# EAGLE board 11-16-21_LEDSubMatrixHighDensity_template (EAGLE 9.6.2)
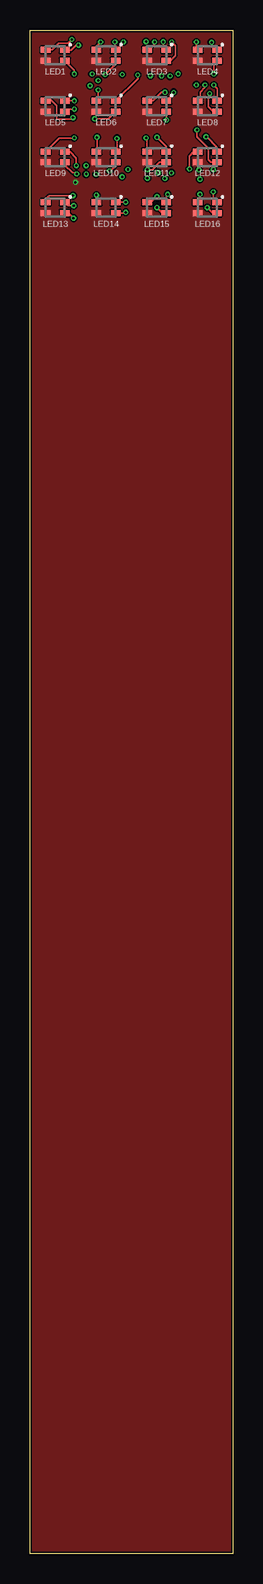
[diagram p0: board, top side]
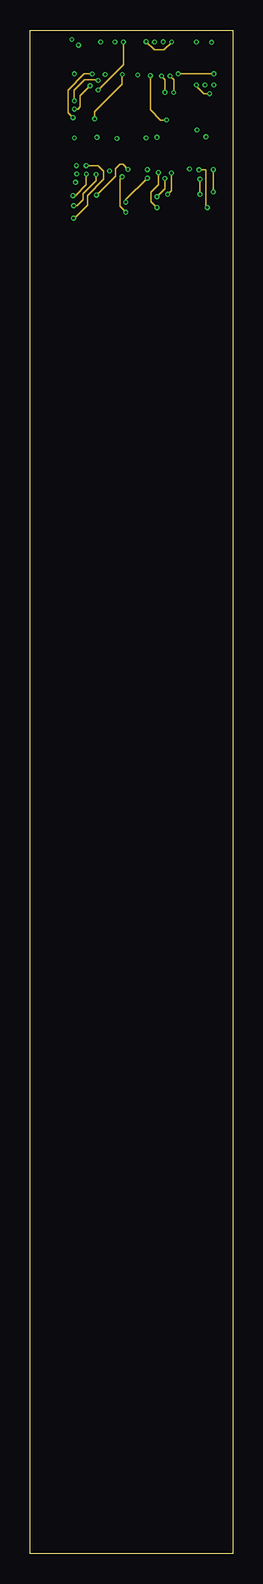
[diagram p1: board, inner layer InnerBottom]
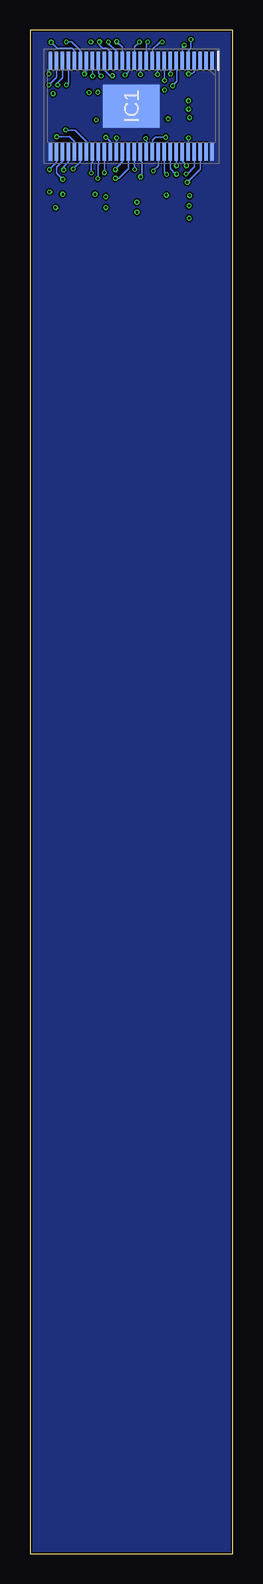
[diagram p2: board, bottom side, seen from below]

Size 16.93 x 127 mm. Coordinates in mm from the lower left corner, seen from the top.
Outline: 0,127 16.93,127 16.93,0 0,0 0,127
Copper layers (1+2*15+16): Top 0.035mm / dielectric 0.2mm / InnerTop 0.0175mm / dielectric 1.065mm / InnerBottom 0.0175mm / dielectric 0.2mm / Bottom 0.035mm
Design rules "jlcpcb_4layer_1oz *": minimum track width 5mil, minimum drill 0.2mm, track to track 5mil, track to pad 0.2mm, pad to pad 5mil, via to via 6mil, smd to smd 5mil, copper to edge 5mil, drill to drill 0.5mm, minimum pad ring 10mil, minimum via ring 0.1mm, stop-mask expansion 4mil, vias tented up to drill 0mil, thermal gap 10mil

## Footprints (pad centres in the part's own frame; a part is rotated, then mirrored left to right if it is on the bottom)
SOP50P810X120-57N = smd 1.475 x 0.3: 1 -3.788,6.75; 2 -3.788,6.25; 3 -3.788,5.75; 4 -3.788,5.25; 5 -3.788,4.75; 6 -3.788,4.25; 7 -3.788,3.75; 8 -3.788,3.25; 9 -3.788,2.75; 10 -3.788,2.25; 11 -3.788,1.75; 12 -3.788,1.25; 13 -3.788,0.75; 14 -3.788,0.25; 15 -3.788,-0.25; 16 -3.788,-0.75; 17 -3.788,-1.25; 18 -3.788,-1.75; 19 -3.788,-2.25; 20 -3.788,-2.75; 21 -3.788,-3.25; 22 -3.788,-3.75; 23 -3.788,-4.25; 24 -3.788,-4.75; 25 -3.788,-5.25; 26 -3.788,-5.75; 27 -3.788,-6.25; 28 -3.788,-6.75; 29 3.788,-6.75; 30 3.788,-6.25; 31 3.788,-5.75; 32 3.788,-5.25; 33 3.788,-4.75; 34 3.788,-4.25; 35 3.788,-3.75; 36 3.788,-3.25; 37 3.788,-2.75; 38 3.788,-2.25; 39 3.788,-1.75; 40 3.788,-1.25; 41 3.788,-0.75; 42 3.788,-0.25; 43 3.788,0.25; 44 3.788,0.75; 45 3.788,1.25; 46 3.788,1.75; 47 3.788,2.25; 48 3.788,2.75; 49 3.788,3.25; 50 3.788,3.75; 51 3.788,4.25; 52 3.788,4.75; 53 3.788,5.25; 54 3.788,5.75; 55 3.788,6.25; 56 3.788,6.75 | smd 3.61 x 4.7: 57 0,0
B38G3RGB = smd 0.8 x 0.5: 1 0.8,0.45; 2 0.8,-0.45; 3 -0.8,-0.45; 4 -0.8,0.45

## Placement (x,y rotation side)
IC1  TLC5955DCAR  [SOP50P810X120-57N]  8.47,120.65 270 bottom
LED1  B38G3RGB  [B38G3RGB]  2.12,124.88 0 top
LED2  B38G3RGB  [B38G3RGB]  6.35,124.88 0 top
LED3  B38G3RGB  [B38G3RGB]  10.58,124.88 0 top
LED4  B38G3RGB  [B38G3RGB]  14.82,124.88 0 top
LED5  B38G3RGB  [B38G3RGB]  2.12,120.65 0 top
LED6  B38G3RGB  [B38G3RGB]  6.35,120.65 0 top
LED7  B38G3RGB  [B38G3RGB]  10.58,120.65 0 top
LED8  B38G3RGB  [B38G3RGB]  14.82,120.65 0 top
LED9  B38G3RGB  [B38G3RGB]  2.12,116.42 0 top
LED10  B38G3RGB  [B38G3RGB]  6.35,116.42 0 top
LED11  B38G3RGB  [B38G3RGB]  10.58,116.42 0 top
LED12  B38G3RGB  [B38G3RGB]  14.82,116.42 0 top
LED13  B38G3RGB  [B38G3RGB]  2.12,112.18 0 top
LED14  B38G3RGB  [B38G3RGB]  6.35,112.18 0 top
LED15  B38G3RGB  [B38G3RGB]  10.58,112.18 0 top
LED16  B38G3RGB  [B38G3RGB]  14.82,112.18 0 top

## Library data of the parts
IC1 = TLC5955DCAR; ARROW_PART_NUMBER: TLC5955DCAR; ARROW_PRICE-STOCK: https://www.arrow.com/en/products/tlc5955dcar/texas-instruments; DESCRIPTION: 48ch, 16bit PWM LED Driver with Dot-Correction, Brightness Control, Open/Short Detection; HEIGHT: 1.2mm; MANUFACTURER_NAME: Texas Instruments; MANUFACTURER_PART_NUMBER: TLC5955DCAR; MOUSER_PART_NUMBER: 595-TLC5955DCAR; MOUSER_PRICE-STOCK: https://www.mouser.co.uk/ProductDetail/Texas-Instruments/TLC5955DCAR?qs=%2Fd%252BFzHvH4c3zo%2FeGYG5n7g%3D%3D
LED1-LED16 = B38G3RGB; ARROW_PART_NUMBER: SML-LX0606IGC-TR; ARROW_PRICE-STOCK: https://www.arrow.com/en/products/sml-lx0606igc-tr/lumex; DESCRIPTION: Standard LEDs - SMD Surface Mount LEDs; HEIGHT: 0.7mm; MANUFACTURER_NAME: Lumex; MANUFACTURER_PART_NUMBER: SML-LX0606IGC-TR; MOUSER_PART_NUMBER: 696-SML-0606IGCTR; MOUSER_PRICE-STOCK: https://www.mouser.co.uk/ProductDetail/Lumex/SML-LX0606IGC-TR?qs=I1ILoAvtKy%252BVd7WFwiUkZQ%3D%3D

## Nets
3V3: IC1.54 LED1.3 LED2.3 LED3.3 LED4.3 LED5.3 LED6.3 LED7.3 LED8.3 LED9.3 LED10.3 LED11.3 LED12.3 LED13.3 LED14.3 LED15.3 LED16.3
GND: IC1.29 IC1.56 IC1.57
GSCLK: IC1.55
LAT: IC1.3
N$LEDB1_IC1_PIN4: IC1.4 LED1.2
N$LEDB2_IC1_PIN10: IC1.10 LED2.2
N$LEDB3_IC1_PIN16: IC1.16 LED3.2
N$LEDB4_IC1_PIN22: IC1.22 LED4.2
N$LEDB5_IC1_PIN7: IC1.7 LED5.2
N$LEDB6_IC1_PIN13: IC1.13 LED6.2
N$LEDB7_IC1_PIN19: IC1.19 LED7.2
N$LEDB8_IC1_PIN25: IC1.25 LED8.2
N$LEDB9_IC1_PIN53: IC1.53 LED9.2
N$LEDB10_IC1_PIN47: IC1.47 LED10.2
N$LEDB11_IC1_PIN41: IC1.41 LED11.2
N$LEDB12_IC1_PIN35: IC1.35 LED12.2
N$LEDB13_IC1_PIN50: IC1.50 LED13.2
N$LEDB14_IC1_PIN44: IC1.44 LED14.2
N$LEDB15_IC1_PIN38: IC1.38 LED15.2
N$LEDB16_IC1_PIN32: IC1.32 LED16.2
N$LEDG1_IC1_PIN6: IC1.6 LED1.1
N$LEDG2_IC1_PIN12: IC1.12 LED2.1
N$LEDG3_IC1_PIN18: IC1.18 LED3.1
N$LEDG4_IC1_PIN24: IC1.24 LED4.1
N$LEDG5_IC1_PIN9: IC1.9 LED5.1
N$LEDG6_IC1_PIN15: IC1.15 LED6.1
N$LEDG7_IC1_PIN21: IC1.21 LED7.1
N$LEDG8_IC1_PIN27: IC1.27 LED8.1
N$LEDG9_IC1_PIN51: IC1.51 LED9.1
N$LEDG10_IC1_PIN45: IC1.45 LED10.1
N$LEDG11_IC1_PIN39: IC1.39 LED11.1
N$LEDG12_IC1_PIN33: IC1.33 LED12.1
N$LEDG13_IC1_PIN48: IC1.48 LED13.1
N$LEDG14_IC1_PIN42: IC1.42 LED14.1
N$LEDG15_IC1_PIN36: IC1.36 LED15.1
N$LEDG16_IC1_PIN30: IC1.30 LED16.1
N$LEDR1_IC1_PIN5: IC1.5 LED1.4
N$LEDR2_IC1_PIN11: IC1.11 LED2.4
N$LEDR3_IC1_PIN17: IC1.17 LED3.4
N$LEDR4_IC1_PIN23: IC1.23 LED4.4
N$LEDR5_IC1_PIN8: IC1.8 LED5.4
N$LEDR6_IC1_PIN14: IC1.14 LED6.4
N$LEDR7_IC1_PIN20: IC1.20 LED7.4
N$LEDR8_IC1_PIN26: IC1.26 LED8.4
N$LEDR9_IC1_PIN52: IC1.52 LED9.4
N$LEDR10_IC1_PIN46: IC1.46 LED10.4
N$LEDR11_IC1_PIN40: IC1.40 LED11.4
N$LEDR12_IC1_PIN34: IC1.34 LED12.4
N$LEDR13_IC1_PIN49: IC1.49 LED13.4
N$LEDR14_IC1_PIN43: IC1.43 LED14.4
N$LEDR15_IC1_PIN37: IC1.37 LED15.4
N$LEDR16_IC1_PIN31: IC1.31 LED16.4
SCLK: IC1.2
SIN_MCU: IC1.1
SOUT1: IC1.28

## Tracks (layer width: path | path; a pad name or v marks a point on that pad's centre or on a via)
3V3  (via drill 0.2)
  Bottom 0.127: IC1.54 2.72,115.38 v3.8,114.3
  pour Top (no thermals): -15.8,127.6 40.4,127.6 40.4,-10.7 -15.8,-10.7
GND
  pour Bottom (no thermals): -23.3,132.1 -23.3,-20.6 32,-20.6 32,132.1
N$LEDB1_IC1_PIN4  (via drill 0.2 pad 0.4)
  Top 0.127: LED1.2 3.7,123.65 v3.7,123.35
  Bottom 0.127: IC1.4 3.22,123.53 3.4,123.35 v3.7,123.35
N$LEDB2_IC1_PIN10  (via drill 0.2)
  Top 0.127: v6.28,123.29 7.15,124.16 LED2.2
  Bottom 0.127: IC1.10 6.28,124.37 v6.28,123.29
N$LEDB3_IC1_PIN16  (via drill 0.2)
  Top 0.127: v11.84,126 12.14,125.7 12.14,124.84 11.73,124.43 LED3.2
  InnerBottom 0.127: v11.84,126 11.18,125.35 10.38,125.35 v9.7,126.03
  Bottom 0.127: IC1.16 9.22,125.55 v9.7,126.03
N$LEDB4_IC1_PIN22  (via drill 0.2)
  Top 0.127: LED4.2 15.35,124.17 v15.35,123.35
  InnerBottom 0.127: v15.35,123.35 v12.38,123.35
  Bottom 0.127: IC1.22 12.22,123.63 12.38,123.46 v12.38,123.35
N$LEDB5_IC1_PIN7  (via drill 0.2 pad 0.4)
  Top 0.127: v3.7,120.4 3.12,120.4 LED5.2
  InnerBottom 0.127: v5.02,122.36 4.2,121.54 4.2,120.6 4,120.4 v3.7,120.4
  Bottom 0.127: IC1.7 4.65,124.37 4.65,122.73 v5.02,122.36
N$LEDB6_IC1_PIN13  (via drill 0.2)
  Top 0.127: v5.4,119.6 6.55,119.6 LED6.2
  InnerBottom 0.127: v7.71,123.29 7.71,122.49 5.4,120.19 v5.4,119.6
  Bottom 0.127: IC1.13 7.72,123.3 v7.71,123.29
N$LEDB7_IC1_PIN19  (via drill 0.2)
  Top 0.127: v11.4,119.5 11.38,119.52 LED7.2
  InnerBottom 0.127: v10.05,123.2 10.05,120.35 10.9,119.5 v11.4,119.5
  Bottom 0.127: IC1.19 10.72,123.67 10.25,123.2 v10.05,123.2
N$LEDB8_IC1_PIN25  (via drill 0.2)
  Top 0.127: v15,121.7 14.9,121.6 14.9,120.6 15.3,120.2 LED8.2
  InnerBottom 0.127: v15,121.7 14.5,121.7 13.9,122.3 v13.9,122.42
  Bottom 0.127: IC1.25 13.72,122.61 v13.9,122.42
N$LEDB9_IC1_PIN53  (via drill 0.2)
  Top 0.127: v3.9,115 3.8,115.1 3.56,115.1 2.92,115.74 LED9.2
  Bottom 0.127: IC1.53 3.22,115.58 3.8,115 v3.9,115
N$LEDB10_IC1_PIN47  (via drill 0.2)
  Top 0.127: v6.65,115.25 6.74,115.25 7.15,115.67 LED10.2
  Bottom 0.127: IC1.47 6.22,115.68 v6.65,115.25
N$LEDB11_IC1_PIN41  (via drill 0.2)
  Top 0.127: v9.8,115.36 v9.8,115.37 10.23,115.37 10.83,115.97 LED11.2
  Bottom 0.127: IC1.41 9.22,116.02 9.8,115.44 v9.8,115.36
N$LEDB12_IC1_PIN35  (via drill 0.2)
  Top 0.127: v13.95,118.66 13.95,118.11 14.9,117.16 14.9,116.18 15.11,115.97 LED12.2
  Bottom 0.127: IC1.35 12.22,117.7 13.17,118.66 v13.95,118.66
N$LEDB13_IC1_PIN50  (via drill 0.2)
  Top 0.127: v3.64,111.31 3.22,111.73 LED13.2
  InnerBottom 0.127: v4.69,115.7 5.7,115.7 6.15,115.25 6.15,114.55 4.8,113.2 4.8,112.4 3.71,111.31 v3.64,111.31
  Bottom 0.127: IC1.50 4.72,115.72 v4.69,115.7
N$LEDB14_IC1_PIN44  (via drill 0.2)
  Top 0.127: v8,111.8 7.93,111.73 LED14.2
  InnerBottom 0.127: v7.7,114.76 7.5,114.56 7.5,112.3 v8,111.8
  Bottom 0.127: IC1.44 7.72,116.08 7.6,115.96 7.6,114.86 v7.7,114.76
N$LEDB15_IC1_PIN38  (via drill 0.2)
  Top 0.127: LED15.2 11.07,111.73 v10.6,112.2
  InnerBottom 0.127: v10.6,112.2 10.1,112.7 10.1,113.49 10.73,114.12 v10.73,115.11
  Bottom 0.127: IC1.38 10.72,115.13 v10.73,115.11
N$LEDB16_IC1_PIN32  (via drill 0.2)
  Top 0.127: v14.8,112.2 15.27,111.73 LED16.2
  InnerBottom 0.127: v14.11,115.34 14.7,115.34 14.7,112.3 v14.8,112.2
  Bottom 0.127: IC1.32 13.72,116.02 14.11,115.62 v14.11,115.34
N$LEDG1_IC1_PIN6  (via drill 0.2 pad 0.4)
  Top 0.127: LED1.1 2.95,125.3 3.42,125.3 3.86,125.74 v4.05,125.74
  Bottom 0.127: IC1.6 4.22,125.57 v4.05,125.74
N$LEDG2_IC1_PIN12  (via drill 0.2)
  Top 0.127: v7.1,126 7.1,125.38 LED2.1
  Bottom 0.127: IC1.12 7.22,125.88 v7.1,126
N$LEDG3_IC1_PIN18  (via drill 0.2)
  Top 0.127: v11.13,126.01 11.13,125.59 LED3.1
  Bottom 0.127: IC1.18 10.22,125.2 10.49,125.47 10.89,125.47 11.13,125.71 v11.13,126.01
N$LEDG4_IC1_PIN24  (via drill 0.2)
  Top 0.127: v15.16,125.97 15.16,125.79 LED4.1
  Bottom 0.127: IC1.24 13.22,125.25 13.42,125.46 14.65,125.46 v15.16,125.97
N$LEDG5_IC1_PIN9  (via drill 0.2 pad 0.4)
  Top 0.127: v3.7,121.1 LED5.1
  InnerBottom 0.127: v5.7,122.8 5.66,122.84 4.54,122.84 3.7,122 v3.7,121.1
  Bottom 0.127: IC1.9 5.72,122.82 v5.7,122.8
N$LEDG6_IC1_PIN15  (via drill 0.2)
  Top 0.127: v9,123.25 9,122.95 LED6.1
  Bottom 0.127: IC1.15 8.72,123.53 v9,123.25
N$LEDG7_IC1_PIN21  (via drill 0.2)
  Top 0.127: v12,121.8 12,121.72 LED7.1
  InnerBottom 0.127: v11.7,123.16 12,122.86 v12,121.8
  Bottom 0.127: IC1.21 11.72,123.62 11.72,123.61 11.72,123.19 v11.7,123.16
N$LEDG8_IC1_PIN27  (via drill 0.2)
  Top 0.127: LED8.1 15.65,121.13 15.65,122.12 v15.35,122.42
  Bottom 0.127: IC1.27 14.72,123.05 v15.35,122.42
N$LEDG9_IC1_PIN51  (via drill 0.2)
  Top 0.127: v3.87,115.7 3.87,116.33 3.33,116.87 LED9.1
  Bottom 0.127: IC1.51 4.22,116.05 v3.87,115.7
N$LEDG10_IC1_PIN45  (via drill 0.2)
  Top 0.127: LED10.1 7.27,116.98 v7.27,117.97
  Bottom 0.127: IC1.45 7.22,117.92 v7.27,117.97
N$LEDG11_IC1_PIN39  (via drill 0.2)
  Top 0.127: v10.6,118.05 11.38,117.27 LED11.1
  Bottom 0.127: IC1.39 10.22,117.67 v10.6,118.05
N$LEDG12_IC1_PIN33  (via drill 0.2)
  Top 0.127: LED12.1 15.62,117.24 14.75,118.1 v14.7,118.1
  Bottom 0.127: IC1.33 13.22,117.7 13.61,118.1 v14.7,118.1
N$LEDG13_IC1_PIN48  (via drill 0.2)
  Top 0.127: v3.65,112.35 3.2,112.35 LED13.1
  InnerBottom 0.127: v5.52,114.96 5.52,114.43 4.45,113.36 4.45,112.85 3.95,112.35 v3.65,112.35
  Bottom 0.127: IC1.48 5.72,115.16 v5.52,114.96
N$LEDG14_IC1_PIN42  (via drill 0.2)
  Top 0.127: v8,112.65 7.98,112.63 LED14.1
  InnerBottom 0.127: v9.8,114.65 8,112.84 v8,112.65
  Bottom 0.127: IC1.42 8.72,115.43 9.5,114.65 v9.8,114.65
N$LEDG15_IC1_PIN36  (via drill 0.2)
  Top 0.127: v11.5,113.3 11.38,113.18 LED15.1
  InnerBottom 0.127: v11.5,113.3 11.81,113.61 v11.81,115.09
  Bottom 0.127: IC1.36 11.72,115.98 11.81,115.89 v11.81,115.09
N$LEDG16_IC1_PIN30  (via drill 0.2)
  Top 0.127: v15.3,113.5 15.3,112.95 LED16.1
  InnerBottom 0.127: v15.31,115.36 v15.3,115.35 v15.3,113.5
  Bottom 0.127: IC1.30 14.72,115.96 v15.31,115.36
N$LEDR1_IC1_PIN5  (via drill 0.2 pad 0.4)
  Top 0.127: LED1.4 1.83,125.33 2.4,125.9 3.2,125.9 v3.5,126.2
  Bottom 0.127: IC1.5 3.72,125.28 3.5,125.5 v3.5,126.2
N$LEDR2_IC1_PIN11  (via drill 0.2)
  Top 0.127: v5.9,126 5.55,125.65 LED2.4
  Bottom 0.127: IC1.11 6.72,125.38 6.1,126 v5.9,126
N$LEDR3_IC1_PIN17  (via drill 0.2)
  Top 0.127: v10.4,126 10.4,125.8 9.93,125.33 LED3.4
  Bottom 0.127: IC1.17 9.72,125.22 10.4,125.9 v10.4,126
N$LEDR4_IC1_PIN23  (via drill 0.2)
  Top 0.127: LED4.4 13.89,125.45 v13.89,126
  Bottom 0.127: IC1.23 12.72,125.27 13.46,126 v13.89,126
N$LEDR5_IC1_PIN8  (via drill 0.2 pad 0.4)
  Top 0.127: v3.6,119.7 3.46,119.56 2.22,119.56 2.22,120.7 1.72,121.2 1.42,121.2 LED5.4
  InnerBottom 0.127: v5.19,123.34 4.54,123.34 3.2,122 3.2,120.1 v3.6,119.7
  Bottom 0.127: IC1.8 5.22,123.36 v5.19,123.34
N$LEDR6_IC1_PIN14  (via drill 0.2)
  Top 0.127: v5.7,122 5.7,121.25 LED6.4
  InnerBottom 0.127: v7.8,126 7.8,124.1 v5.7,122
  Bottom 0.127: IC1.14 8.22,125.58 v7.8,126
N$LEDR7_IC1_PIN20  (via drill 0.2)
  Top 0.127: v11.27,121.8 10.99,121.8 10.28,121.1 LED7.4
  InnerBottom 0.127: v10.99,123.16 10.99,123.14 11.27,122.86 v11.27,121.8
  Bottom 0.127: IC1.20 11.22,123.39 v10.99,123.16
N$LEDR8_IC1_PIN26  (via drill 0.2)
  Top 0.127: v14.61,122.42 14.61,122.22 14.21,121.82 14.21,121.29 LED8.4
  Bottom 0.127: IC1.26 14.22,123.02 14.61,122.62 v14.61,122.42
N$LEDR9_IC1_PIN52  (via drill 0.2)
  Top 0.127: LED9.4 2.45,118 v3.7,118
  Bottom 0.127: IC1.52 3.72,117.8 3.7,117.82 v3.7,118
N$LEDR10_IC1_PIN46  (via drill 0.2)
  Top 0.127: LED10.4 5.55,116.97 5.6,117.02 v5.6,118.05
  Bottom 0.127: IC1.46 6.72,117.8 6.47,118.05 v5.6,118.05
N$LEDR11_IC1_PIN40  (via drill 0.2)
  Top 0.127: v9.7,118 9.78,117.92 LED11.4
  Bottom 0.127: IC1.40 9.7,116.88 v9.7,118
N$LEDR12_IC1_PIN34  (via drill 0.2)
  Top 0.127: LED12.4 13.67,116.87 13.3,116.5 13.3,115.44 v13.32,115.42
  Bottom 0.127: IC1.34 12.72,116.02 v13.32,115.42
N$LEDR13_IC1_PIN49  (via drill 0.2)
  Top 0.127: v3.6,113.2 1.6,113.2 1.32,112.92 LED13.4
  InnerBottom 0.127: v4.7,114.99 4.7,114.09 3.81,113.2 v3.6,113.2
  Bottom 0.127: v4.7,114.99 4.79,114.99 5.22,115.42 IC1.49
N$LEDR14_IC1_PIN43  (via drill 0.2)
  Top 0.127: LED14.4 v5.55,113.24
  InnerBottom 0.127: v5.55,113.24 7.14,114.83 7.14,115.44 7.5,115.8 7.76,115.8 v8.19,115.37
  Bottom 0.127: IC1.43 8.22,115.4 v8.19,115.37
N$LEDR15_IC1_PIN37  (via drill 0.2)
  Top 0.127: v10.6,113.1 10.55,113.1 10.08,112.63 LED15.4
  InnerBottom 0.127: v11.26,114.63 11.26,113.76 v10.6,113.1
  Bottom 0.127: v11.26,114.63 11.26,115.72 11.22,115.76 IC1.37
N$LEDR16_IC1_PIN31  (via drill 0.2)
  Top 0.127: LED16.4 14.2,112.82 v14.2,113.3
  InnerBottom 0.127: v14.2,114.56 v14.2,113.3
  Bottom 0.127: IC1.31 14.22,116.06 14.72,115.56 14.72,115.08 v14.2,114.56